# Altium PCB ECU_PCB.PcbDoc
Units mm, origin at the board's own origin, x right, y up, seen from the top; angles counter-clockwise.
Board outline 70.61 x 84.2 mm, 2 copper layers (Top Layer, Bottom Layer); 31 components, 34 nets, 129 pads, 0 vias.
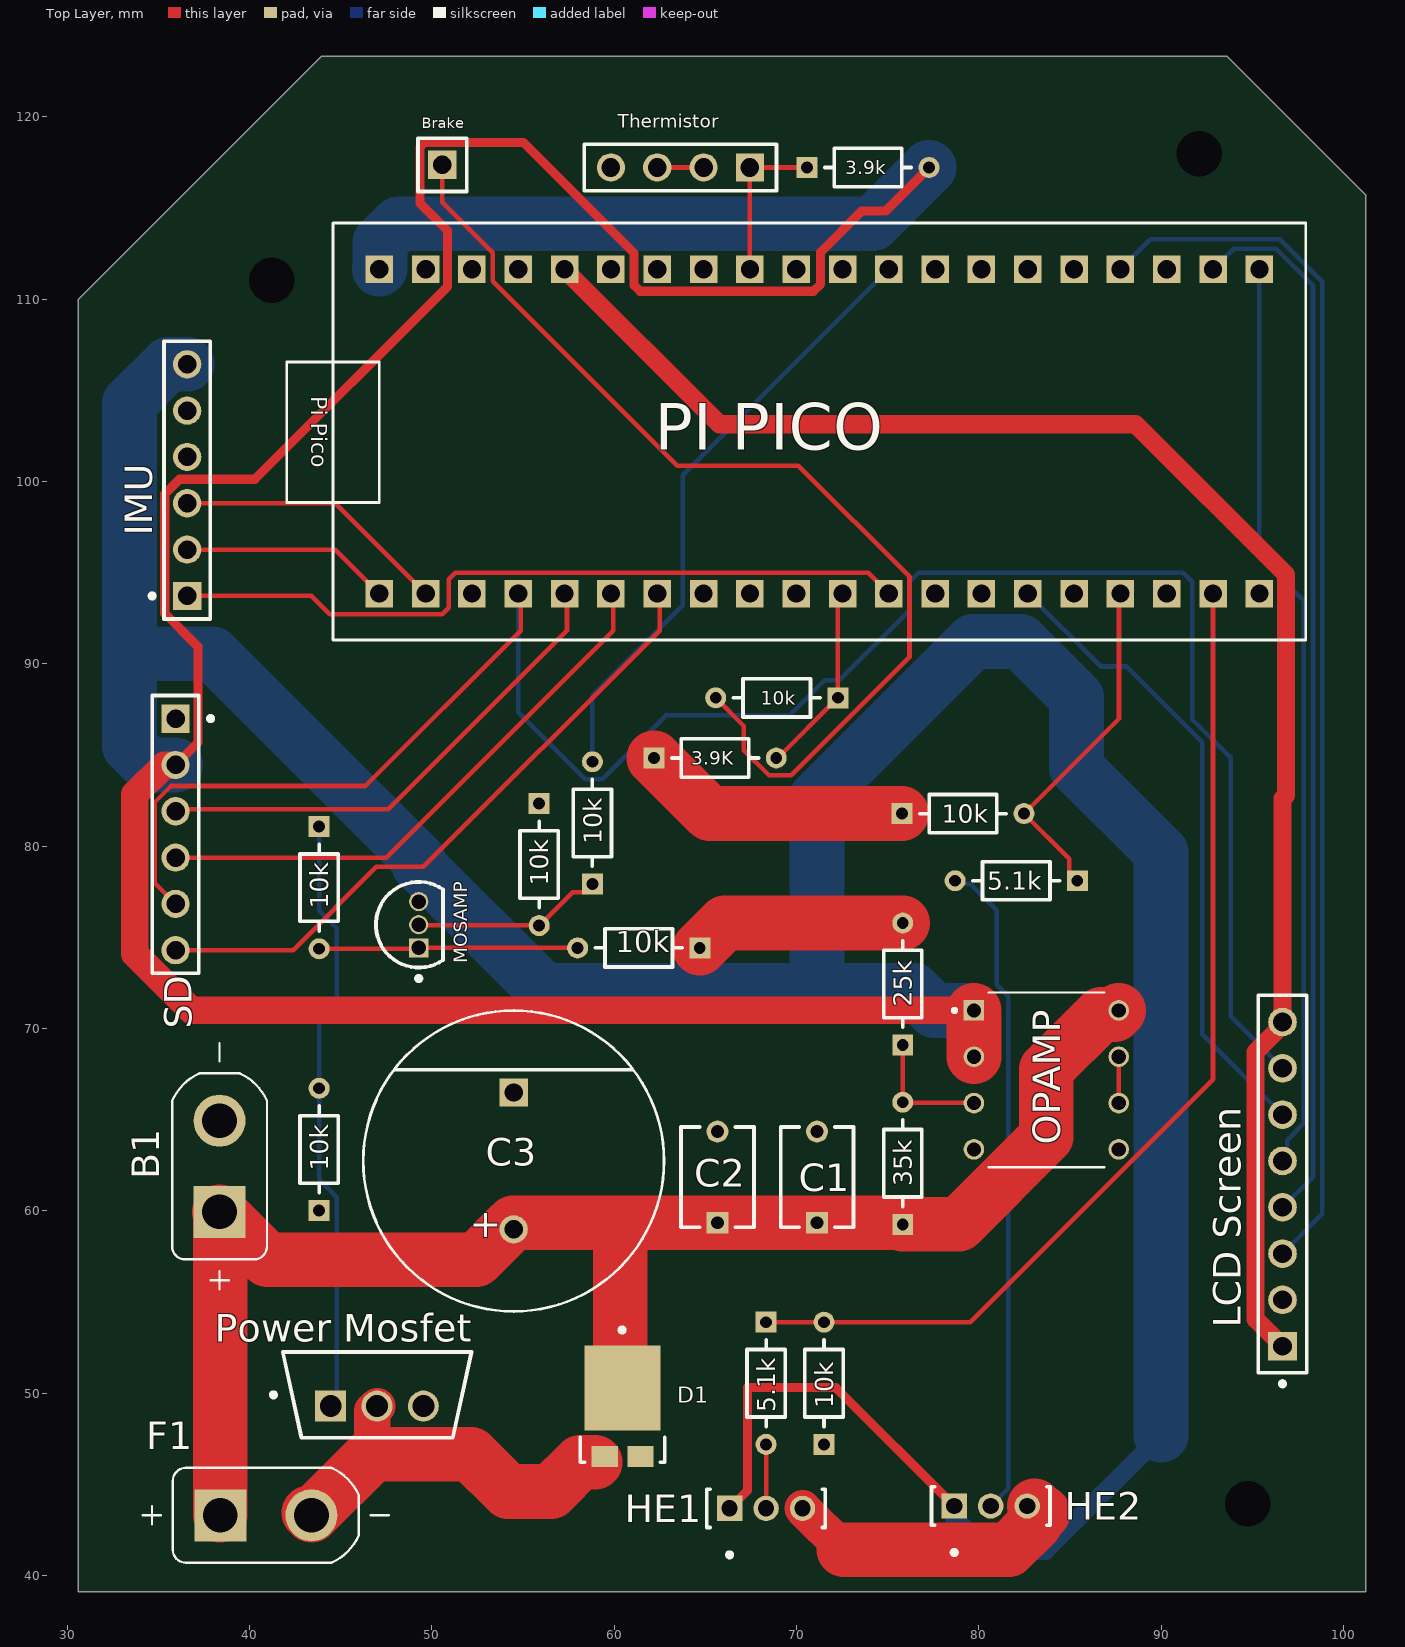
[diagram p0: Top Layer view]
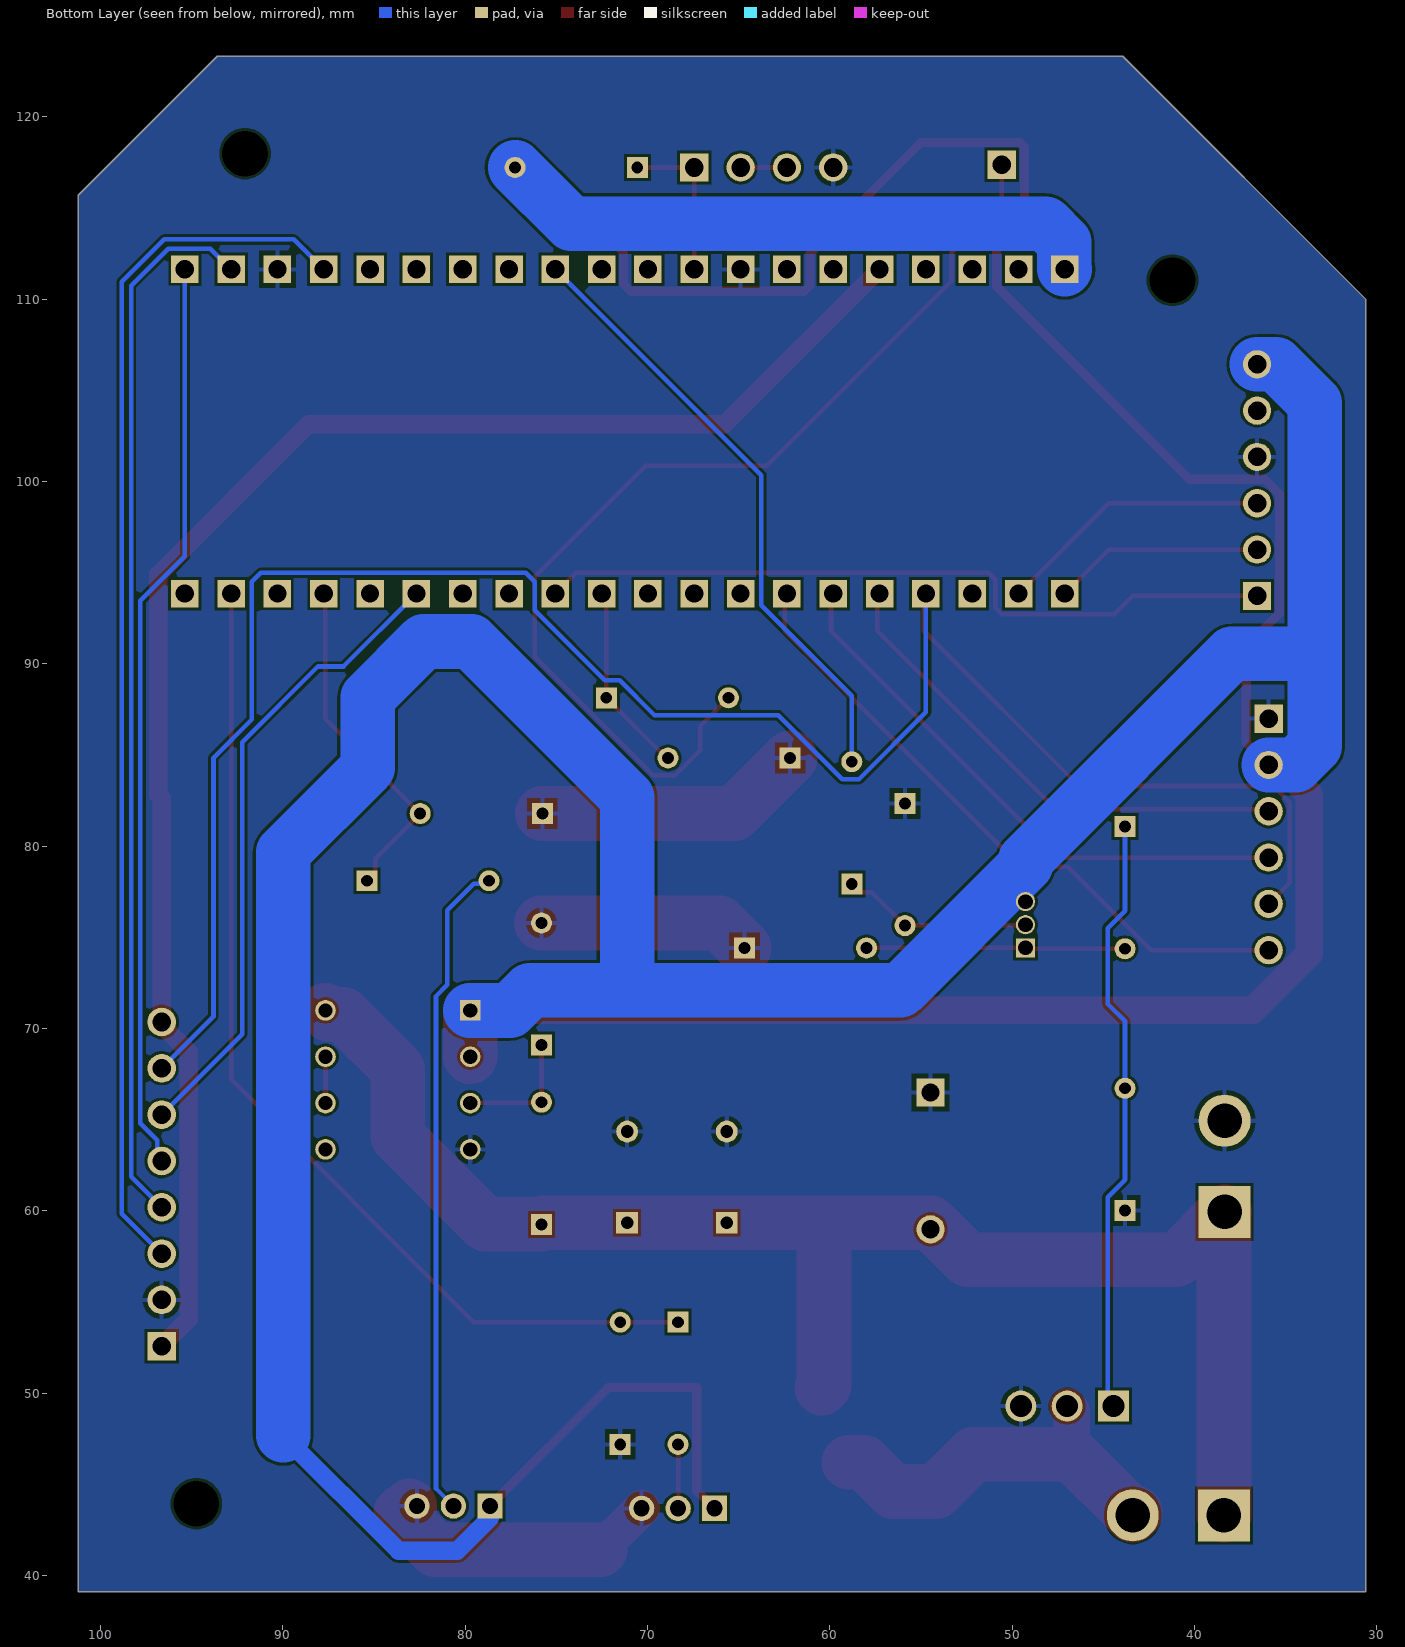
[diagram p1: Bottom Layer view, seen from below]
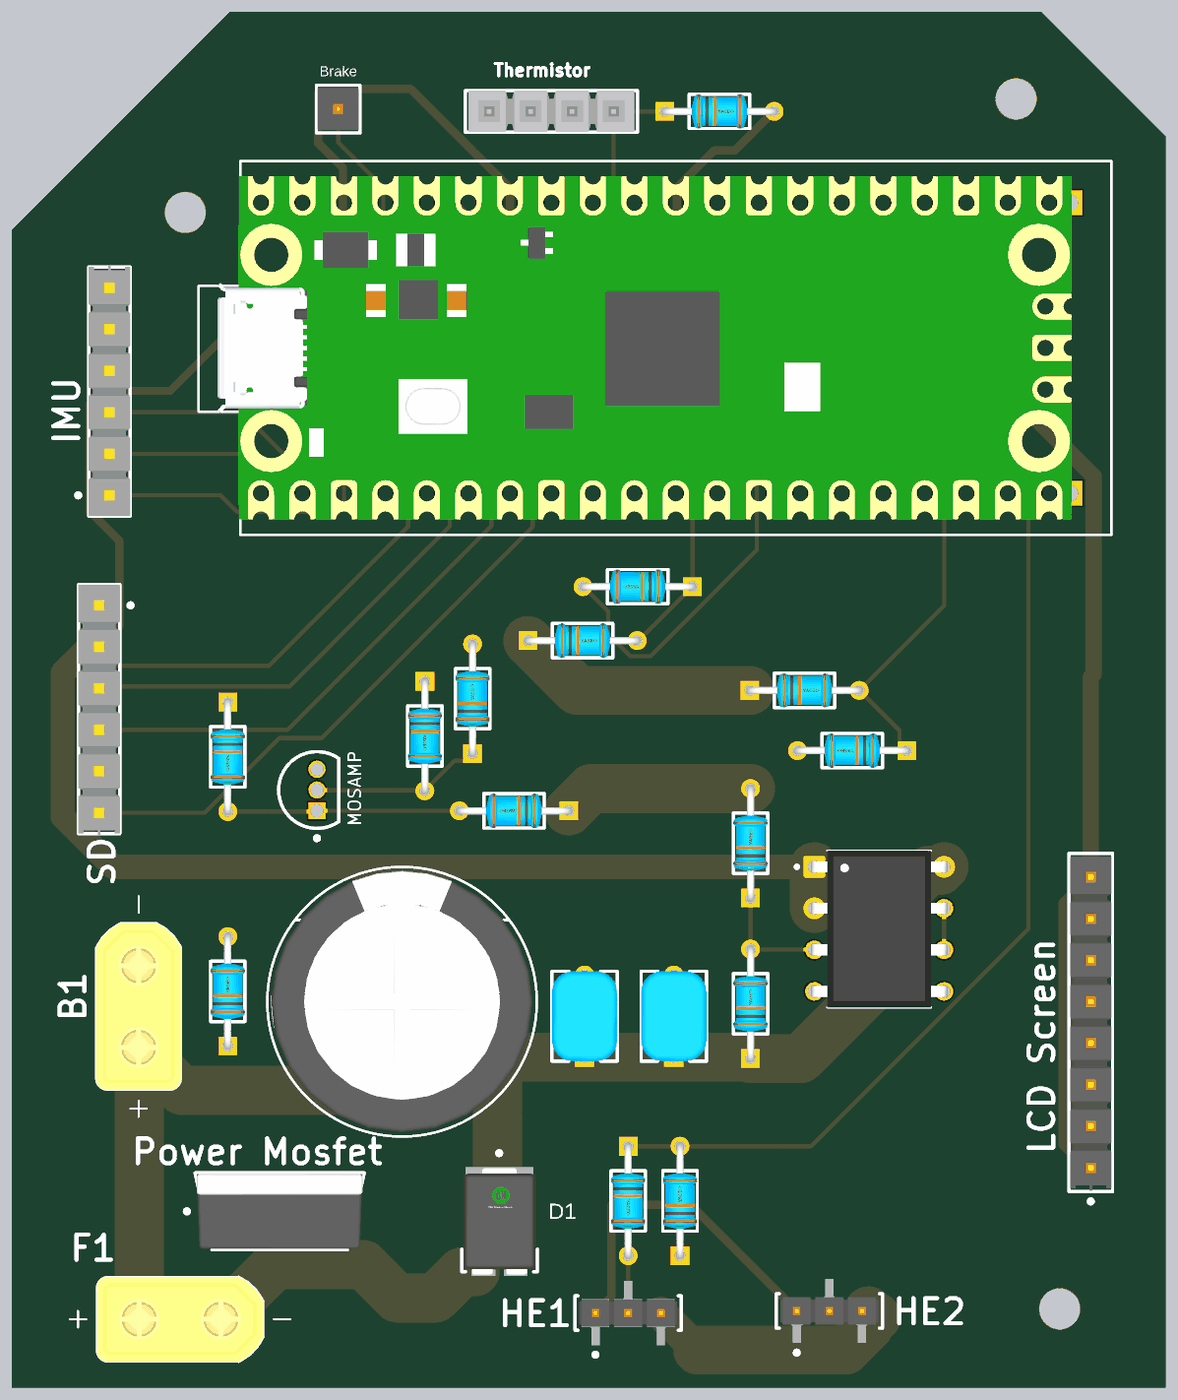
[diagram p2: 3D render of the assembled board from above, using the file's embedded part models]

## Layer stack, top to bottom
Top Solder: solder mask 0.0102, Solder Resist, Dk 3.5
Top Layer: signal copper 0.0356
Dielectric 1: dielectric 0.32, FR-4, Dk 4.8
Bottom Layer: signal copper 0.0356
Bottom Solder: solder mask 0.0102, Solder Resist, Dk 3.5

## Board outline
43.942,123.317 30.607,109.982 30.607,39.116 101.219,39.116 101.219,115.697 93.599,123.317

## Design rules (kind name [scope] priority, off if disabled: settings)
AssemblyTestPointUsage [All] p1: isadvanced=TRUE
AssemblyTestpoint [All] p1: isadvanced=TRUE testpointundercomponent=TRUE minsize=1.016 maxsize=2.54 preferedsize=1.524 minholesize=0 maxholesize=1.016 preferedholesize=0.813 testpointgrid=0.025 usegrid=TRUE gridtolerance=0 allowsidetop=TRUE allowsidebottom=TRUE
Clearance Clearance_1 [OnMid vs OnMid] p1: gap=0.15 ignorepadtopadclearanceinfootprint=FALSE sourcerule=46 cellrowname=All cellrowtype=0 cellcolname=All cellcoltype=0 innerlayers=TRUE
Clearance Clearance_2 [(ExistsOnLayer('Top Layer') Or ExistsOnLayer('Bottom Layer')) vs (ExistsOnLayer('Top Layer') Or ExistsOnLayer('Bottom Layer'))] p2: gap=0.15 ignorepadtopadclearanceinfootprint=FALSE sourcerule=46 cellrowname=All cellrowtype=0 cellcolname=All cellcoltype=0 outerlayers=TRUE
Clearance [All] p3: gap=0.254 ignorepadtopadclearanceinfootprint=FALSE ismatrix=TRUE
ComponentClearance [All] p1: isadvanced=TRUE gap=0.254 collisioncheckmode=3 verticalgap=0.254 showdistances=FALSE
FabricationTestPointUsage [All] p1: isadvanced=TRUE valid=0 allowmultiple=FALSE
FabricationTestpoint [All] p1: isadvanced=TRUE side=3 testpointundercomponent=TRUE minsize=1.016 maxsize=2.54 preferedsize=1.524 minholesize=0 maxholesize=1.016 preferedholesize=0.813 testpointgrid=0.025 allowsidetop=TRUE allowsidebottom=TRUE usegrid=TRUE gridtolerance=0
FanoutControl Fanout_BGA [IsBGA] p1: isadvanced=TRUE bgadir=Out bgaviamode=Centered fanoutstyle=Auto fanoutdirection=Alternating viagrid=0.025 // Fanout_BGA (Default Rule)
FanoutControl Fanout_LCC [IsLCC] p2: isadvanced=TRUE bgadir=Out bgaviamode=Centered fanoutstyle=Auto fanoutdirection=Alternating viagrid=0.025 // Fanout_LCC (Default Rule)
FanoutControl Fanout_SOIC [IsSOIC] p3: isadvanced=TRUE bgadir=Out bgaviamode=Centered fanoutstyle=Auto fanoutdirection=Alternating viagrid=0.025 // Fanout_SOIC (Default Rule)
FanoutControl Fanout_Small [(CompPinCount < 5)] p4: isadvanced=TRUE bgadir=Out bgaviamode=Centered fanoutstyle=Auto fanoutdirection=OutThenIn viagrid=0.025 // Fanout_Small (Default Rule)
FanoutControl Fanout_Default [All] p5: isadvanced=TRUE bgadir=Out bgaviamode=Centered fanoutstyle=Auto fanoutdirection=Alternating viagrid=0.025 // Fanout_Default (Default Rule)
Height [All] p1: isadvanced=TRUE minheight=0 maxheight=25.4 prefheight=12.7
HoleSize [All] p1: isadvanced=TRUE absolutevalues=TRUE maxlimit=2.54 minlimit=0.025 maxpercent=80.000 minpercent=20.000
HoleToHoleClearance [All] p1: isadvanced=TRUE gap=0.254 allowstackedmicrovias=TRUE
LayerPairs [All] p1: isadvanced=TRUE enforce=TRUE
MinimumSolderMaskSliver [All] p1: isadvanced=TRUE minsoldermaskwidth=0.01
NetAntennae [All] p1: isadvanced=TRUE netantennaetolerance=0
PasteMaskExpansion [All] p1: isadvanced=TRUE expansion=0
PlaneClearance [All] p1: isadvanced=TRUE clearance=0.508
PlaneConnect [All] p1: isadvanced=TRUE planeconnectstyle=Relief reliefexpansion=0.508 reliefentries=4 reliefconductorwidth=0.254 reliefairgap=0.254
PolygonConnect [All] p1: connectstyle=Relief reliefconductorwidth=0.254 reliefentries=4 polygonreliefangle="90 Angle" airgapwidth=0.254
RoutingCorners [All] p1: isadvanced=TRUE cornerstyle=45-Degree minsetback=2.54 maxsetback=2.54
RoutingPriority [All] p1: isadvanced=TRUE routingpriority=0
RoutingVias [All] p1: holewidth=0.711 width=1.27 viastyle="Through Hole" minholewidth=0.711 minwidth=1.27 maxholewidth=0.711 maxwidth=1.27
ShortCircuit [All] p1: isadvanced=TRUE allowed=FALSE
SilkToSilkClearance [All] p1: isadvanced=TRUE silktosilkclearance=0.05
SilkToSolderMaskClearance [IsPad] p1: isadvanced=TRUE minsilkscreentomaskgap=0.05 clearancetoexposedcopper=TRUE
SolderMaskExpansion [All] p1: isadvanced=TRUE expansion=0.102 istentingtop=FALSE
SupplyNets "Schematic Supply Nets_4" [InNet('Brake12V+')] p1: isadvanced=TRUE voltage=0.000
SupplyNets "Schematic Supply Nets_3" [InNet('GND')] p2: isadvanced=TRUE voltage=0.000
SupplyNets "Schematic Supply Nets_2" [InNet('3.3V+')] p3: isadvanced=TRUE voltage=0.000
SupplyNets "Schematic Supply Nets_1" [InNet('5V+')] p4: isadvanced=TRUE voltage=0.000
SupplyNets "Schematic Supply Nets" [InNet('12V+')] p5: isadvanced=TRUE voltage=0.000
UnRoutedNet [All] p1: isadvanced=TRUE
UnpouredPolygon [All] p1: isadvanced=TRUE
Width "Schematic Width Constraint_2" [InNet('12V+')] p1: maxlimit=3 minlimit=1 preferedwidth=3 minimp=50.000000 maximp=50.000000 favimp=50.000000
Width "Schematic Width Constraint_1" [InNet('NetD1_2')] p2: maxlimit=3 minlimit=1 preferedwidth=3 minimp=50.000000 maximp=50.000000 favimp=50.000000
Width MaxMinWidth_1 [InNet('3.3V+')] p3: maxlimit=3 minlimit=0.254 preferedwidth=3 minimp=50.000000 maximp=50.000000 favimp=50.000000
Width MaxMinWidth_2 [InNet('5V+')] p4: maxlimit=3 minlimit=0.254 preferedwidth=3 minimp=50.000000 maximp=50.000000 favimp=50.000000
Width "Schematic Width Constraint_3" [InNetClass('Power')] p5: maxlimit=3 minlimit=1 preferedwidth=3 minimp=50.000000 maximp=50.000000 favimp=50.000000
Width [All] p6: maxlimit=0.254 minlimit=0.254 preferedwidth=0.254
4 further rules are at their usual default settings.

## Classes and differential pairs
net class Power: 3.3V+ 5V+ 12V+ Brake12V+ GND NetD1_2
component class LCD_screen: "LCD Screen"
component class Batteries: B1 "Brake Fuse" C1 C2 C3 "Sensor Fuse"
component class SD_Card: SD SDR1
component class Pico: 25k 35k OPAMP "Pi Pico" R5 R6
component class IMU: IMU
component class "Hall Effect": 5.1k "5.1k Ohm Resistor" "5.1k resistor" 10k "10k Ohm resistor" "10k resistor" HE1 HE2
component class EngineLines: "Engine KillSwitch 1" "Engine KillSwitch 2"
component class "CVT Temperature": R8 "RC Filter ADC?" Thermistor
component class BilgeFanDriver: D1 F1 FanSwitch MOSAMP "Power Mosfet" R7

## Components (designator, comment, footprint, x,y, rotation, side; value= is the part's Value field where it differs from the comment)
3.9k "3.9K" FP-MFR-12-MFG 73.914,117.221 r0 top (schematic designator R6.1)
3.9K "3.9K" FP-MFR-12-MFG 65.532,84.836 r0 top (schematic designator R2.2)
5.1k "5.1K" FP-MFR-12-MFG 82.042,78.105 r180 top (schematic designator R7.3)
5.1k "5.1K" FP-MFR-12-MFG 68.326,50.546 r270 top (schematic designator R7.1)
10k "10K" FP-MFR-12-MFG 79.121,81.788 r0 top (schematic designator R7.4)
10k "10K" FP-MFR-12-MFG 71.501,50.546 r90 top (schematic designator R7.2)
10k "10K" FP-MFR-12-MFG 43.815,63.373 r90 top (schematic designator R5.5)
10k "10K" FP-MFR-12-MFG 43.815,77.724 r270 top (schematic designator R5.4)
10k "10K" FP-MFR-12-MFG 55.88,78.994 r270 top (schematic designator R5.2)
10k "10K" FP-MFR-12-MFG 58.801,81.28 r90 top (schematic designator R5.1)
10k "10K" FP-MFR-12-MFG 68.913,88.138 r180 top (schematic designator R2.1)
25k "25K" FP-MFR-12-MFG 75.819,72.438 r90 top (schematic designator R4.2)
35k "35K" FP-MFR-12-MFG 75.819,62.611 r90 top (schematic designator R4.1)
B1 "Sensor Battery Connector" AMASS_XT30UPB-M 38.354,62.444 r90 top
Brake "TSW-101-07-L-S" FP-TSW-101-07-L-S-MFG 50.574,117.361 r90 top (schematic designator BrakeOutput)
C1 "100nF" FP-RDE3M1-MFG 71.12,61.849 r90 top
C2 "1uF" FP-RDE3M1-MFG 65.659,61.849 r90 top
C3 "1mF" FP-RAD-TH-D_16_0_5-L_20_2-MFG 54.483,62.738 r270 top
D1 "Ideal Flyback Diode" FP-340BQ-MFG 60.452,49.292 r270 top value=730pF
F1 "Fan Connector Male" AMASS_XT30UPB-M 40.894,43.307 r0 top
HE1 "TMM-103-05-L-S" FP-TMM-103-05-L-S-MFG 68.326,43.688 r0 top (schematic designator "Hall Effect Sensor 1")
HE2 "TMM-103-05-L-S" FP-TMM-103-05-L-S-MFG 80.645,43.815 r0 top (schematic designator "Hall Effect Sensor 2")
IMU "TSW-106-07-S-S" SMTC-TSW-106-07-S-S_V 36.576,100.076 r90 top
"LCD Screen" "LCD" FP-TSW-108-08-G-S-MFG 96.647,61.468 r90 top
MOSAMP "2N7000" ONSC-TO-92-3-29-11 49.276,75.692 r90 top (schematic designator "MOSFET AMP")
OPAMP "TLV2372IP" DIP794W45P254L959H508Q8 83.693,67.183 r0 top (schematic designator "Pico Op AMP")
"Pi Pico" "RASPBERRY_PI_PICO" RASPBERRY_PI_PICO 69.977,102.743 r90 top
"Power Mosfet" "CSD19536KCS" FP-KCS0003B-MFG 46.99,49.911 r90 top
R5.3 "10K" FP-MFR-12-MFG 61.341,74.422 r180 top
SD "SD Card" SMTC-TSW-106-07-S-S_V 35.941,80.645 r270 top (schematic designator "SD interface")
Thermistor "4 Pin Header" SMTC-TSW-104-08-X-S 67.437,117.221 r180 top (schematic designator "Thermistor interface")

## Footprints (in the part's own frame and the unit in brackets; to place one, negate y for a bottom-side part, rotate by r counter-clockwise, add the part's x,y. Pads: shape width x height; smd on the part's side, far side on the other; paste and mask are expansions set on the pad)
AMASS_XT30UPB-M [mm]
  round 2.85 hole 1.9 mask+0.102: N(2.5,0)
  rect 2.85x2.85 / inner round 2.85 / far side rect 2.85x2.85 hole 1.9 mask+0.102: P(-2.5,0)
  silkscreen extent -6.75,-2.61 6.75,2.61, body extent -5.1,-2.6 5.1,2.6, height 10.7
DIP794W45P254L959H508Q8 [mm]
  rect 1.13x1.13 / inner round 1.13 / far side rect 1.13x1.13 hole 0.78 mask+0.102: 1(-3.97,3.81)
  round 1.13 hole 0.78 mask+0.102: 2(-3.97,1.27) 3(-3.97,-1.27) 4(-3.97,-3.81) 5(3.97,-3.81) 6(3.97,-1.27) 7(3.97,1.27) 8(3.97,3.81)
  silkscreen extent -5.13,-4.79 3.17,4.79, body extent -4.15,-4.79 4.15,4.79, height 5.08
FP-340BQ-MFG [mm]
  rect 1.15x1.45 smd paste+0 mask+0: 1(2.75,0.985) 2(2.75,-0.985)
  rect 4.65x4.15 smd paste+0 mask+0: 3(-1,0)
  silkscreen extent -4.3,-2.31 3.08,2.31, body extent -3.42,-2.41 3.42,2.41, height 0.25
FP-KCS0003B-MFG [mm]
  rect 1.7x1.7 hole 1.2 paste-2539.97 mask+0: 1(-0.617,2.54)
  round 1.7 hole 1.2 paste-2539.97 mask+0: 2(-0.617,0) 3(-0.617,-2.54)
  silkscreen extent -2.35,-5.18 2.35,5.8, body extent -2.45,-5.28 2.45,5.28, height 0.25
FP-MFR-12-MFG [mm]
  rect 1.15x1.15 hole 0.65 paste-2539.97 mask+0: 1(-3.35,0)
  round 1.15 hole 0.65 paste-2539.97 mask+0: 2(3.35,0)
  silkscreen extent -2.37,-1.05 2.37,1.05, body extent -4.03,-1.15 4.03,1.15, height 0.25
FP-RAD-TH-D_16_0_5-L_20_2-MFG [mm]
  rect 1.55x1.55 hole 1 paste-2539.97 mask+0: 1(-3.75,0)
  round 1.55 hole 1 paste-2539.97 mask+0: 2(3.75,0)
  silkscreen extent -8.25,-8.25 8.25,8.25, body extent -8.35,-8.35 8.35,8.35, height 0.25
FP-RDE3M1-MFG [mm]
  rect 1.2x1.2 hole 0.7 paste-2539.97 mask+0: 1(-2.5,0)
  round 1.2 hole 0.7 paste-2539.97 mask+0: 2(2.5,0)
  silkscreen extent -2.75,-2 2.75,2, body extent -3.2,-2.1 3.2,2.1, height 0.25
FP-TMM-103-05-L-S-MFG [mm]
  rect 1.39x1.39 hole 0.89 paste-2539.97 mask+0: 1(-2,0)
  round 1.39 hole 0.89 paste-2539.97 mask+0: 2(0,0) 3(2,0)
  silkscreen extent -3.25,-2.67 3.25,1.05, body extent -3.1,-2.07 3.1,2.07, height 0.25
FP-TSW-101-07-L-S-MFG [mm]
  rect 1.57x1.57 hole 1.02 paste-2539.97 mask+0: 1(0,0)
  silkscreen extent -1.46,-1.34 1.46,1.34, body extent -1.56,-1.44 1.56,1.44, height 0.25
FP-TSW-108-08-G-S-MFG [mm]
  rect 1.57x1.57 hole 1.02 paste-2539.97 mask+0: 1(-8.89,0)
  round 1.57 hole 1.02 paste-2539.97 mask+0: 2(-6.35,0) 3(-3.81,0) 4(-1.27,0) 5(1.27,0) 6(3.81,0) 7(6.35,0) 8(8.89,0)
  silkscreen extent -11.07,-1.34 10.35,1.34, body extent -10.45,-1.44 10.45,1.44, height 0.25
ONSC-TO-92-3-29-11 [mm] "TO, 3-Leads, Body Dia 4.7mm, Pitch 1.27mm"
  rect 1.05x1.05 hole 0.8: 1(-1.27,0)
  round 1.05 hole 0.8: 2(0,0) 3(1.27,0)
  silkscreen extent -3.07,-1.34 2.35,2.35, body extent -2.35,-1.33 2.36,2.36, height 7.87
RASPBERRY_PI_PICO [mm]
  rect 1.508x1.508 / inner round 1.508 / far side rect 1.508x1.508 hole 1: 3V3(8.89,12.7) 3V3_EN(8.89,15.24) ADC_VREF(8.89,10.16) AGND(8.89,5.08) GND(8.89,17.78) GND2(8.89,-7.62) GND3(8.89,-20.32) GND4(-8.89,17.78) GND5(-8.89,5.08) GND6(-8.89,-7.62) GND7(-8.89,-20.32) GP0(-8.89,22.86) GP1(-8.89,20.32) GP2(-8.89,15.24) GP3(-8.89,12.7) GP4(-8.89,10.16) GP5(-8.89,7.62) GP6(-8.89,2.54) GP7(-8.89,0) GP8(-8.89,-2.54) GP9(-8.89,-5.08) GP10(-8.89,-10.16) GP11(-8.89,-12.7) GP12(-8.89,-15.24) GP13(-8.89,-17.78) GP14(-8.89,-22.86) GP15(-8.89,-25.4) GP16(8.89,-25.4) GP17(8.89,-22.86) GP18(8.89,-17.78) GP19(8.89,-15.24) GP20(8.89,-12.7) GP21(8.89,-10.16) GP22(8.89,-5.08) GP26_A0(8.89,0) GP27_A1(8.89,2.54) GP28_A2(8.89,7.62) RUN(8.89,-2.54) VBUS(8.89,22.86) VSYS(8.89,20.32)
  silkscreen extent -11.43,-27.94 11.43,27.94, body extent -10.5,-25.5 10.5,26.8, height 3.73
SMTC-TSW-104-08-X-S [mm] ".025 SQ Post Terminal Strip Assembly, 1x4 Pins, Vertical, 2.54mm Pitch, Male"
  rect 1.55x1.55 hole 1.02: 1(0,0)
  round 1.55 hole 1.02: 2(2.54,0) 3(5.08,0) 4(7.62,0)
  silkscreen extent -1.46,-1.27 9.08,1.27, body extent -1.27,-1.27 8.89,1.27, height 8.38
SMTC-TSW-106-07-S-S_V [mm] "Header, 6-Leads, Body 15.24x2.54mm, Pitch 2.54mm"
  rect 1.55x1.55 hole 1.02: 1(-6.35,0)
  round 1.55 hole 1.02: 2(-3.81,0) 3(-1.27,0) 4(1.27,0) 5(3.81,0) 6(6.35,0)
  silkscreen extent -7.62,-1.27 7.62,2.04, body extent -7.62,-1.27 7.75,1.27, height 8.38

## Part data
3.9k 3.9K 5.1k 5.1k 10k 10k 10k 10k 10k 10k 10k 25k 35k R5.3: library part CMP-03413-000012-1, "RES MF 1/6W 1% AXIAL", Max Operating Temperature=155°C, Min Operating Temperature=-55°C, Power Rating=160mW, Resistance=10kR, Tolerance=1%, Voltage Rating=200V, Packaging="Ammo Pack", Termination=Axial, Voltage Rating (DC)=200V
B1 F1: library part XT30UPB-M, "Socket; DC supply; XT30; male; PIN: 2; on PCBs; THT; yellow; 15A; 500V", Package=None, Check_prices=https://www.snapeda.com/parts/XT30UPB-M/AMASS/view-part/?ref=eda, MF=amass, MP=XT30UPB-M, SnapEDA_Link=https://www.snapeda.com/parts/XT30UPB-M/AMASS/view-part/?ref=snap
Brake: library part CMP-02766-001775-1, "CONN HEADER VERT 1POS", Color=Black, Flammability Rating="UL94 V-0", Max Current Rating=7.6A, Max Operating Temperature=125°C, Max Voltage Rating (AC)=550V, Min Operating Temperature=-55°C, Connector Type=Header, Contact Finish - Mating=GOLD, Contact Material=Bronze, Contact Mating Length=0.23inch, Contact Plating=Gold, Contact Shape=Square, Contact Type="Male Pin", Depth=2.54mm, Fastening Type=Pull, Gender=Male, Housing Color=Black, Housing Material=Polyester, Insulation Color=Black, Insulation Material=PBT, Lead Free="Lead Free", Length=2.54mm, Mount="Through Hole", Number of Contacts=1, Number of Positions=1, Number Of Rows=1, Orientation=Straight, Packaging=Bulk, Radiation Hardening=No, Reach SVHC Compliant=Yes, RoHS Compliant=Yes, Series=TSW, Termination=Solder, Width=2.54mm
C1 C2: library part CMP-06035-041241-1, "Ceramic Capacitor 100nF ±10% 500V X7R Radial"
C3: library part CMP-05427-002178-1, "Aluminum Electrolytic Capacitors (Radial Lead Type) AEC-Q200 Qualified 1000uF ±20% 35V", Case/Package=Radial, ESR (Equivalent Series Resistance)=29mR, Max Operating Temperature=105°C, Min Operating Temperature=-55°C, Package Quantity=250, Ratings=AEC-Q200, Ripple Current=2.205A, Tolerance=20%, Voltage Rating=35V, Capacitance=1mF, Contact Plating=Tin, Diameter=16mm, Height=20mm, Height - Seated (Max)=1.063inch, Impedance=29mR, Lead Diameter=0.8mm, Lead Pitch=7.5mm, Length=20mm, Life (Hours)=5000Hour, Mount="Through Hole", Packaging="Tape and Reel", Polarity=Polar, Radiation Hardening=No, RoHS Compliant=Yes, Series=FC, Termination=Radial, Voltage Rating (DC)=35V
D1: library part CMP-004-00031-1, "Rectifier Diode, Schottky, 1 Phase, 1 Element, 5A, 40V V(RRM), Silicon, TO-277", Average Rectified Current=5A, Case/Package=TO-277-3, Forward Voltage=520mV, Manufacturer Lifecycle Status=ACTIVE, Max Forward Surge Current (Ifsm)=150A, Max Junction Temperature (Tj)=150°C, Max Repetitive Reverse Voltage (Vrrm)=40V, Min Operating Temperature=-55°C, Peak Reverse Current=250µA, China RoHS=Non-Compliant, Country of Origin="Mainland China", Element Configuration=Single, Export Control Classification Number (ECCN) Code=EAR99, Forward Current=5A, Harmonized Tariff Schedule (HTS) Code=8541.10.00.80, Height=1.2mm, Introduction Date=2015-10-16, Lifecycle Status=Production, Max Operating Temperature=150°C, Max Output current=5A, Max Reverse Voltage (DC)=40V, Mounting Technology="Surface Mount", Number of Elements=1, Number of Terminals=3, Packaging="Cut Tape", REACH SVHC=No, Reverse Standoff Voltage=40V, Reverse Voltage=40V, RoHS=Compliant, Schedule B="8541100080, 8541100080", Weight=113.6mg
HE1 HE2: library part CMP-02766-001628-1, "2MM TERMINAL STRIP", Insulation Color=Black, Max Operating Temperature=125°C, Min Operating Temperature=-55°C, Connector Type=Header, Contact Finish - Mating=GOLD, Contact Material=Bronze, Contact Plating=Gold, Contact Shape=Square, Contact Type="Male Pin", Fastening Type=Pull, Gender=Male, Insulation Material=Polymer, Lead Free="Lead Free", Mount="Through Hole", Number of Contacts=3, Number of Positions=3, Number Of Rows=1, Packaging=Bulk, Pitch=2mm, Radiation Hardening=No, RoHS Compliant=Yes, Series=TMM, Termination=Solder
IMU SD: library part CMP-1681-00007-2, "Male Header, Pitch 2.54 mm, 1 x 6 Position, Height 8.38 mm, Tail Length 2.54 mm, -55 to 125 degC, RoHS, Bulk", Colour=Black, Manufacturer=Samtec, Max Operating Temperature="125 degC", Min Operating Temperature="-55 degC", Package Quantity=1, ComponentLink1Description="Manufacturer URL", ComponentLink1URL=http://www.samtec.com/, ComponentLink2Description=Datasheet, ComponentLink2URL=http://suddendocs.samtec.com/catalog_english/tsw_th.pdf, ComponentLink3Description="Package Specification", ComponentLink3URL=http://suddendocs.samtec.com/prints/tsw-xxx-xx-x-x-xx-xxx-footprint.pdf, Contact Finish=Gold, Contact Material=Bronze, Contact Plating=Gold, DatasheetVersion=12/2015, Height="8.38 mm", Lead Pitch="0.1 inch", Length="15.24 mm", Mount="Through Hole", Mounting Technology="Through Hole", PackageDescription="Male Header, Pitch 2.54 mm, 1 x 6 Position, Height 8.38 mm, Tail Length 2.54 mm", PackageReference=TSW-102-07-S-S, Packaging=Bulk, Pins=6, RoHSCompliant=true, Rows=1
"LCD Screen": library part CMP-02766-000001-1, "CONN HEADER VERT 8POS 2.54MM", Manufacturer=Samtec, Manufacturer Part Number=TSW-108-08-G-S, Temperature="-55°C to +125°C", Temperature Range High=+125°C, Temperature Range Low=-55°C, Automotive=No, Category=Conn, ComponentLink2Description=Datasheet, ComponentLink2URL=http://suddendocs.samtec.com/catalog_english/tsw_th.pdf, Conn Gender=Male, Conn Orientation=Straight, Contact Material=Gold,Nickel, Device Class L1=Connectors, Device Class L2="Headers and Wire Housings", Device Class L3=unset, Digikey Description="CONN HEADER VERT 8POS 2.54MM", Footprint Url=http://suddendocs.samtec.com/prints/tsw-xxx-xx-x-x-xx-xxx-footprint.pdf, Height=8.71mm, Lead Free=Yes, Mouser Description="TSW - Samtec 2.54mm Pin Header 13.46mm Overall Pin Length 5.08mm Tail", Number of Contacts=8, Number Of Rows=1, Octopart=https://octopart.com/tsw-108-08-g-s-samtec-272653, Package=TSW-108-08-G-S, Pitch=2.54mm, RoHS=TRUE
MOSAMP: library part CMP-1058-00936-1, "Small Signal MOSFET, 200 mA, 60 V, N-Channel, 3-Pin TO-92, Bulk Box", Manufacturer="On Semiconductor", Package Type=TO-92, Channel Polarity="N Channel", Ciss Typ (pF)=60, ComponentLink1Description="Manufacturer URL", ComponentLink1URL=http://www.onsemi.com/, ComponentLink2Description=Datasheet, ComponentLink2URL=http://www.onsemi.com/pub_link/Collateral/2N7000-D.PDF, ComponentLink3Description="Package Specification", ComponentLink3URL=http://www.onsemi.cn/pub_link/Collateral/2N6426-D.PDF, Configuration=Single, Coss Typ (pF)=25, Crss Typ (pF)=5, DatasheetVersion="Rev. 8", ID Max (A)=0.2, Mounting Technology="Through Hole", PackageDescription="3-Pin Transistor Outline, Body 4.825 x 3.685 mm, Pitch 1.27 mm", PackageReference=TO-92-3-29-11_AM_SL, PackageVersion="Rev. AM", Packing="Bulk Box", PartNumber=2N7000, PD Max (W)=0.35, V(BR)DSS Min (V)=60, VGS Max (V)=20, VGS(th) Max (V)=3
OPAMP: "Dual, 16-V, 3-MHz, RRIO operational amplifier", Package="PDIP-8 Texas", Check_prices=https://www.snapeda.com/parts/TLV2372IP/Texas+Instruments/view-part/?ref=eda, MF="Texas Instruments", MP=TLV2372IP, SnapEDA_Link=https://www.snapeda.com/parts/TLV2372IP/Texas+Instruments/view-part/?ref=snap
"Pi Pico": "Raspberry Pi Board, Arm Cortex-M0+; Core Architecture:Arm; Core Sub-Architecture:Cortex-M0+; Kit Contents:Raspberry Pi Pico Board; No. Of Bits:32Bit; Silicon Core Number:Rp2040; Silicon Manufacturer:Raspberry Pi", Package=None, Check_prices=https://www.snapeda.com/parts/RASPBERRY%20PI%20PICO/Raspberry+Pi/view-part/?ref=eda, MF="Raspberry Pi", MP="RASPBERRY PI PICO", SnapEDA_Link=https://www.snapeda.com/parts/RASPBERRY%20PI%20PICO/Raspberry+Pi/view-part/?ref=snap
"Power Mosfet": library part CMP-04962-000045-1, "MOSFET N-CH 100V TO-220", Case/Package=TO-220, Continuous Drain Current (ID)=150A, Drain to Source Breakdown Voltage=100V, Drain to Source Resistance=2.5mR, Gate to Source Voltage (Vgs)=20V, Input Capacitance=12nF, Max Operating Temperature=175°C, Max Power Dissipation=375W, Min Operating Temperature=-55°C, Package Quantity=50, Threshold Voltage=2.5V, Contact Plating=Tin, Drain to Source Voltage (Vdss)=100V, Element Configuration=Single, Fall Time=5ns, Height=16.51mm, Lead Free="Lead Free", Length=10.67mm, Mount="Through Hole", Number of Channels=1, Number of Pins=3, Packaging=Rail/Tube, Rds On Max=2.7mR, REACH SVHC="No SVHC", Rise Time=8ns, RoHS Compliant=Yes, Turn-Off Delay Time=38ns, Turn-On Delay Time=14ns, Weight=0.211644oz, Width=4.7mm
Thermistor: library part CMP-1024-00357-1, "0.025\" SQ Post Header, Through-hole, Vertical, -55 to 125 degC, 2.54 mm Pitch, 4-Pin, Male, RoHS", Manufacturer=Samtec, PartNumber=TSW-104-08-G-S, Temperature Range="-55 to 125 degC", ComponentLink1Description="Manufacturer URL", ComponentLink1URL=http://www.samtec.com, ComponentLink2Description=Datasheet, ComponentLink2URL=http://www.samtec.com/documents/webfiles/pdf/TSW_TH.PDF, ComponentLink3Description="Package Specification", ComponentLink3URL=http://www.samtec.com/documents/webfiles/cpdf/TSW-XXX-XX-XXX-X-XX-XXX-MKT.pdf, DatasheetVersion=F-214, Mounting Technology=Through-hole, Orientation=Vertical, PackageDescription=".025[0.64] SQ. Post Terminal Strip Assembly", PackageReference=TSW-104-08-X-S, PackageVersion="DM, 8/1988", Pitch="2.54 mm", RoHS=True

## Free pads (board coordinates)
  round 1.524 hole 2.5: 4(92.075,117.983) 5(41.214,111.038) 6(94.742,43.942)

## Nets (pads, with @x,y where several pads share a name; then routed paths per layer and width w, separated by ;. In a path a pad name is that pad's centre, name@x,y a point inside that pad or via, vN(x,y) a via of type N, cw(c..) or ccw(c..) an arc to the next point about the centre after c; other vN are vias at no path point)
3.3V+: "LCD Screen.1" "LCD Screen.8" "Pi Pico.3V3" | length 90.1
  Top Layer w1: 57.277,111.633 65.772,103.138 88.59,103.138 96.831,94.897 96.831,82.797 96.647,82.613 96.647,70.358 96.647,70.204 95.162,68.719 95.162,54.063 96.647,52.578
5V+: 3.9k.2 "Pi Pico.VBUS" HE1.1 HE2.1 IMU.6 MOSAMP.3 OPAMP.1 OPAMP.2 SD.2 | length 364.7
  Top Layer w0.5: SD.2 37.166,85.68 37.166,90.95 35.351,92.765 35.351,99.313 36.159,100.121 40.289,100.121 50.861,110.693 50.861,113.752 49.339,115.273 49.339,118.332 49.603,118.596 54.998,118.596 61.087,112.507 61.087,110.759 61.417,110.429 70.917,110.429 71.313,110.825 71.313,112.573 73.575,114.835 74.878,114.835 3.9k.2 ; HE1.1 67.301,44.663 67.301,50.305 72.155,50.305 HE2.1
  Top Layer w1.5: SD.2 35.931,84.445 35.313,84.445 33.708,82.84 33.708,74.088 36.803,70.993 OPAMP.1
  Top Layer w3: OPAMP.2 OPAMP.1
  Bottom Layer w1: HE2.1 78.645,43.155 80.434,41.366 83.659,41.366 89.982,47.689
  Bottom Layer w3: SD.2 34.45,84.455 33.412,85.493 33.412,90.551 ; IMU.6 35.539,106.426 33.412,104.299 33.412,90.551 ; 47.117,111.633 47.149,111.665 47.149,113.114 48.176,114.141 74.184,114.141 3.9k.2 ; OPAMP.1 77.545,70.993 76.445,72.093 70.739,72.093 ; 89.982,47.689 89.982,79.663 85.349,84.296 85.349,88.16 82.28,91.229 79.676,91.229 71.12,82.673 71.12,72.474 70.739,72.093 ; 33.412,90.551 37.969,90.551 49.276,79.244 49.276,78.954 56.137,72.093 70.739,72.093
12V+: 35k.1 B1.P C1.1 C2.1 C3.2 D1.3 F1.P OPAMP.8 | length 84.1
  Top Layer w3: F1.P 38.394,59.904 B1.P 40.985,57.313 52.427,57.313 54.229,59.115 54.463,59.349 60.325,59.349 ; D1.3 60.325,50.419 60.325,59.349 ; OPAMP.8 87.442,70.772 86.702,70.772 83.693,67.763 83.693,64.063 78.891,59.261 35k.1 75.731,59.349 C1.1 C2.1 60.325,59.349
Brake12V+: 
GND: 3.9K.1 10k.1@43.815,60.023 10k.1@55.88,82.344 10k.1@71.501,47.196 10k.1@75.771,81.788 25k.2 "LCD Screen.2" "Pi Pico.AGND" "Pi Pico.GND3" "Power Mosfet.3" B1.N C1.2 C2.2 C3.1 HE1.3 HE2.3 IMU.4 OPAMP.4 R5.3.1 SD.1 Thermistor.4 | length 42.2
  Top Layer w2: HE1.3 72.594,41.42
  Top Layer w3: 3.9K.1 65.23,81.788 10k.1@75.771,81.788 ; R5.3.1 66.057,75.788 25k.2 ; 72.594,41.42 81.637,41.42 83.04,42.823 83.04,42.959 83.529,43.449 83.406,43.449 HE2.3@83.04,43.815
NetB2_P: 
"NetBrake Light L_1": 10k.2@65.563,88.138 Brake.1 | length 57.3
  Top Layer w0.254: Brake.1 50.574,115.302 53.332,112.545 53.332,110.991 63.461,100.862 70.095,100.862 76.192,94.765 76.192,90.378 69.694,83.88 68.486,83.88 67.11,85.256 67.11,86.591 10k.2@65.563,88.138
NetD1_2: "Power Mosfet.2" D1.2 F1.N | length 21.4
  Top Layer w2: 46.736,46.649 46.736,49.04 46.99,49.294
  Top Layer w3: F1.N@43.26,43.441 F1.N 46.736,46.649 52.143,46.649 54.186,44.606 56.526,44.606 58.137,46.217 58.141,46.213 D1.2@58.958,46.213
"NetHall Effect Sensor 1_2": 5.1k.2@68.326,47.196 HE1.2 | length 3.5
  Top Layer w0.254: HE1.2 5.1k.2@68.326,47.196
"NetHall Effect Sensor 2_2": 5.1k.2@78.692,78.105 HE2.2 | length 36.3
  Bottom Layer w0.254: 5.1k.2@78.692,78.105 78.863,77.934 79.531,77.934 80.978,76.487 80.978,72.398 81.604,71.772 81.604,44.774 HE2.2
NetIMU_1: "Pi Pico.GP9" IMU.1 | length 41.2
  Top Layer w0.254: IMU.1 43.392,93.726 44.4,92.718 50.569,92.718 50.927,93.076 50.927,94.63 51.285,94.988 73.922,94.988 75.057,93.853
NetIMU_2: "Pi Pico.GP0" IMU.2 | length 11.5
  Top Layer w0.254: IMU.2 44.704,96.266 47.117,93.853
NetIMU_3: "Pi Pico.GP1" IMU.3 | length 15.1
  Top Layer w0.254: IMU.3 44.704,98.806 49.657,93.853
"NetLCD Screen_3": "LCD Screen.3" "Pi Pico.GP18" | length 66.9
  Bottom Layer w0.254: 87.757,111.633 89.4,113.276 96.499,113.276 98.829,110.946 98.829,59.84 96.647,57.658
"NetLCD Screen_4": "LCD Screen.4" "Pi Pico.GP17" | length 58
  Bottom Layer w0.254: 92.837,111.633 93.972,112.768 96.289,112.768 98.321,110.736 98.321,61.872 96.647,60.198
"NetLCD Screen_5": "LCD Screen.5" "Pi Pico.GP16" | length 50.4
  Bottom Layer w0.254: 95.377,111.633 95.377,95.9 97.813,93.464 97.813,64.795 96.899,63.881 96.899,62.99 96.647,62.738
"NetLCD Screen_6": "LCD Screen.6" "Pi Pico.GP11" | length 35.2
  Bottom Layer w0.254: 82.677,93.853 86.674,89.856 88.074,89.856 92.235,85.695 92.235,69.69 96.647,65.278
"NetLCD Screen_7": "LCD Screen.7" "Pi Pico.GP2" SD.5 | length 111.6
  Top Layer w0.254: SD.5 34.785,77.991 34.785,82.394 35.69,83.299 46.342,83.299 54.864,91.821 54.864,93.726 54.737,93.853
  Bottom Layer w0.254: 54.737,93.853 54.737,87.342 58.405,83.674 59.331,83.674 62.839,87.182 69.618,87.182 71.53,89.094 72.345,89.094 76.192,92.941 76.192,94.495 76.685,94.988 91.209,94.988 91.702,94.495 91.702,86.946 93.802,84.846 93.802,70.663 96.647,67.818
"NetMOSFET AMP_1": 10k.2@43.815,74.374 MOSAMP.1 R5.3.2 | length 14.2
  Top Layer w0.254: 10k.2@43.815,74.374 49.228,74.374 MOSAMP.1 R5.3.2
"NetMOSFET AMP_2": 10k.1@58.801,77.93 10k.2@55.88,75.644 MOSAMP.2 | length 10.5
  Top Layer w0.254: MOSAMP.2 49.3,75.668 55.856,75.668 55.88,75.644 57.718,77.482 58.353,77.482 10k.1@58.801,77.93
"NetPi Pico_GP3": "Pi Pico.GP3" SD.3 | length 27.7
  Top Layer w0.254: SD.3 36.056,82.03 47.613,82.03 57.404,91.821 57.404,93.726 57.277,93.853
"NetPi Pico_GP4": "Pi Pico.GP4" SD.4 | length 31.2
  Top Layer w0.254: SD.4 47.498,79.375 59.944,91.821 59.944,93.726 59.817,93.853
"NetPi Pico_GP5": "Pi Pico.GP5" SD.6 | length 35.9
  Top Layer w0.254: SD.6 42.384,74.295 46.956,78.867 49.53,78.867 62.484,91.821 62.484,93.726 62.357,93.853
"NetPi Pico_GP8": 3.9K.2 10k.1@72.263,88.138 "Pi Pico.GP8" | length 10.6
  Top Layer w0.254: 3.9K.2 68.961,84.836 72.263,88.138 72.263,93.599 72.517,93.853
"NetPi Pico_GP13": 5.1k.1@85.392,78.105 10k.2@82.471,81.788 "Pi Pico.GP13" | length 19.1
  Top Layer w0.254: 5.1k.1@85.392,78.105 84.944,78.553 84.944,79.315 82.471,81.788 87.678,86.995 87.678,93.774 87.757,93.853
"NetPi Pico_GP14": 5.1k.1@68.326,53.896 10k.2@71.501,53.896 "Pi Pico.GP14" | length 56.7
  Top Layer w0.254: 5.1k.1@68.326,53.896 71.501,53.896 79.524,53.896 92.837,67.209 92.837,93.853
"NetPi Pico_GP22": 10k.2@58.801,84.63 "Pi Pico.GP22" | length 33.7
  Bottom Layer w0.254: 10k.2@58.801,84.63 58.801,88.25 63.762,93.211 63.762,100.338 75.057,111.633
"NetPi Pico_GP27_A1": 3.9k.1 "Pi Pico.GP27_A1" Thermistor.1 | length 8.7
  Top Layer w0.254: 67.437,111.633 Thermistor.1 3.9k.1
"NetPico Op AMP_3": 25k.1 35k.2 OPAMP.3 | length 7.1
  Top Layer w0.254: 25k.1 35k.2 75.843,65.937 79.699,65.937 OPAMP.3
"NetPico Op AMP_6": OPAMP.6 OPAMP.7 | length 2.5
  Top Layer w0.254: OPAMP.6 OPAMP.7
"NetPower Mosfet_1": 10k.1@43.815,81.074 10k.2@43.815,66.723 "Power Mosfet.1" | length 33.1
  Bottom Layer w0.254: 10k.1@43.815,81.074 43.815,76.464 44.771,75.508 44.771,71.346 43.815,70.39 43.815,66.723 43.815,61.712 44.771,60.756 44.771,49.615 44.45,49.294
NetS1_1: 
NetS1_2: 
"NetThermistor interface_2": Thermistor.2 Thermistor.3 | length 2.5
  Top Layer w0.254: Thermistor.3 Thermistor.2
pads on no net: "Pi Pico.3V3_EN" "Pi Pico.ADC_VREF" "Pi Pico.GND2" "Pi Pico.GND4" "Pi Pico.GND5" "Pi Pico.GND6" "Pi Pico.GND7" "Pi Pico.GND" "Pi Pico.GP6" "Pi Pico.GP7" "Pi Pico.GP10" "Pi Pico.GP12" "Pi Pico.GP15" "Pi Pico.GP19" "Pi Pico.GP20" "Pi Pico.GP21" "Pi Pico.GP26_A0" "Pi Pico.GP28_A2" "Pi Pico.RUN" "Pi Pico.VSYS" D1.1 IMU.5 OPAMP.5

## Polygon pours and split planes (outlines as drawn)
GND on Bottom Layer "GND_L02_P000" (solid, pour order 0): 101.219,39.116 30.607,39.116 30.607,109.982 43.942,123.317 93.599,123.317 101.219,115.697 101.219,113.917

## Silkscreen, mask and mechanical layers (free items; w line width, h text height)
Top Overlay:
  text "10k" at 60.071,73.787 h2
  text "+" at 52.07,58.547 h1.52

## Text inside footprints (layer, text, board x,y; h text height)
"Pi Pico": Top Overlay "PI PICO" at 62.23,101.727 h2.54